# Altium PCB Sinistro_TestBed_RevA-1.PcbDoc (part 3 of 4)
Units mil, origin at the board's own origin, x right, y up, seen from the top; angles counter-clockwise.
Board outline 17000 x 8000 mil, 7 copper layers (Top Layer (*.GTL), MidLayer1 (*.G1), MidLayer2 (*.G2), MidLayer3 (*.G3), DIG GND (*.GP1), AGND (*.GP2), Bottom Layer (*.GBL)); 262 components, 309 nets, 2223 pads, 663 vias.
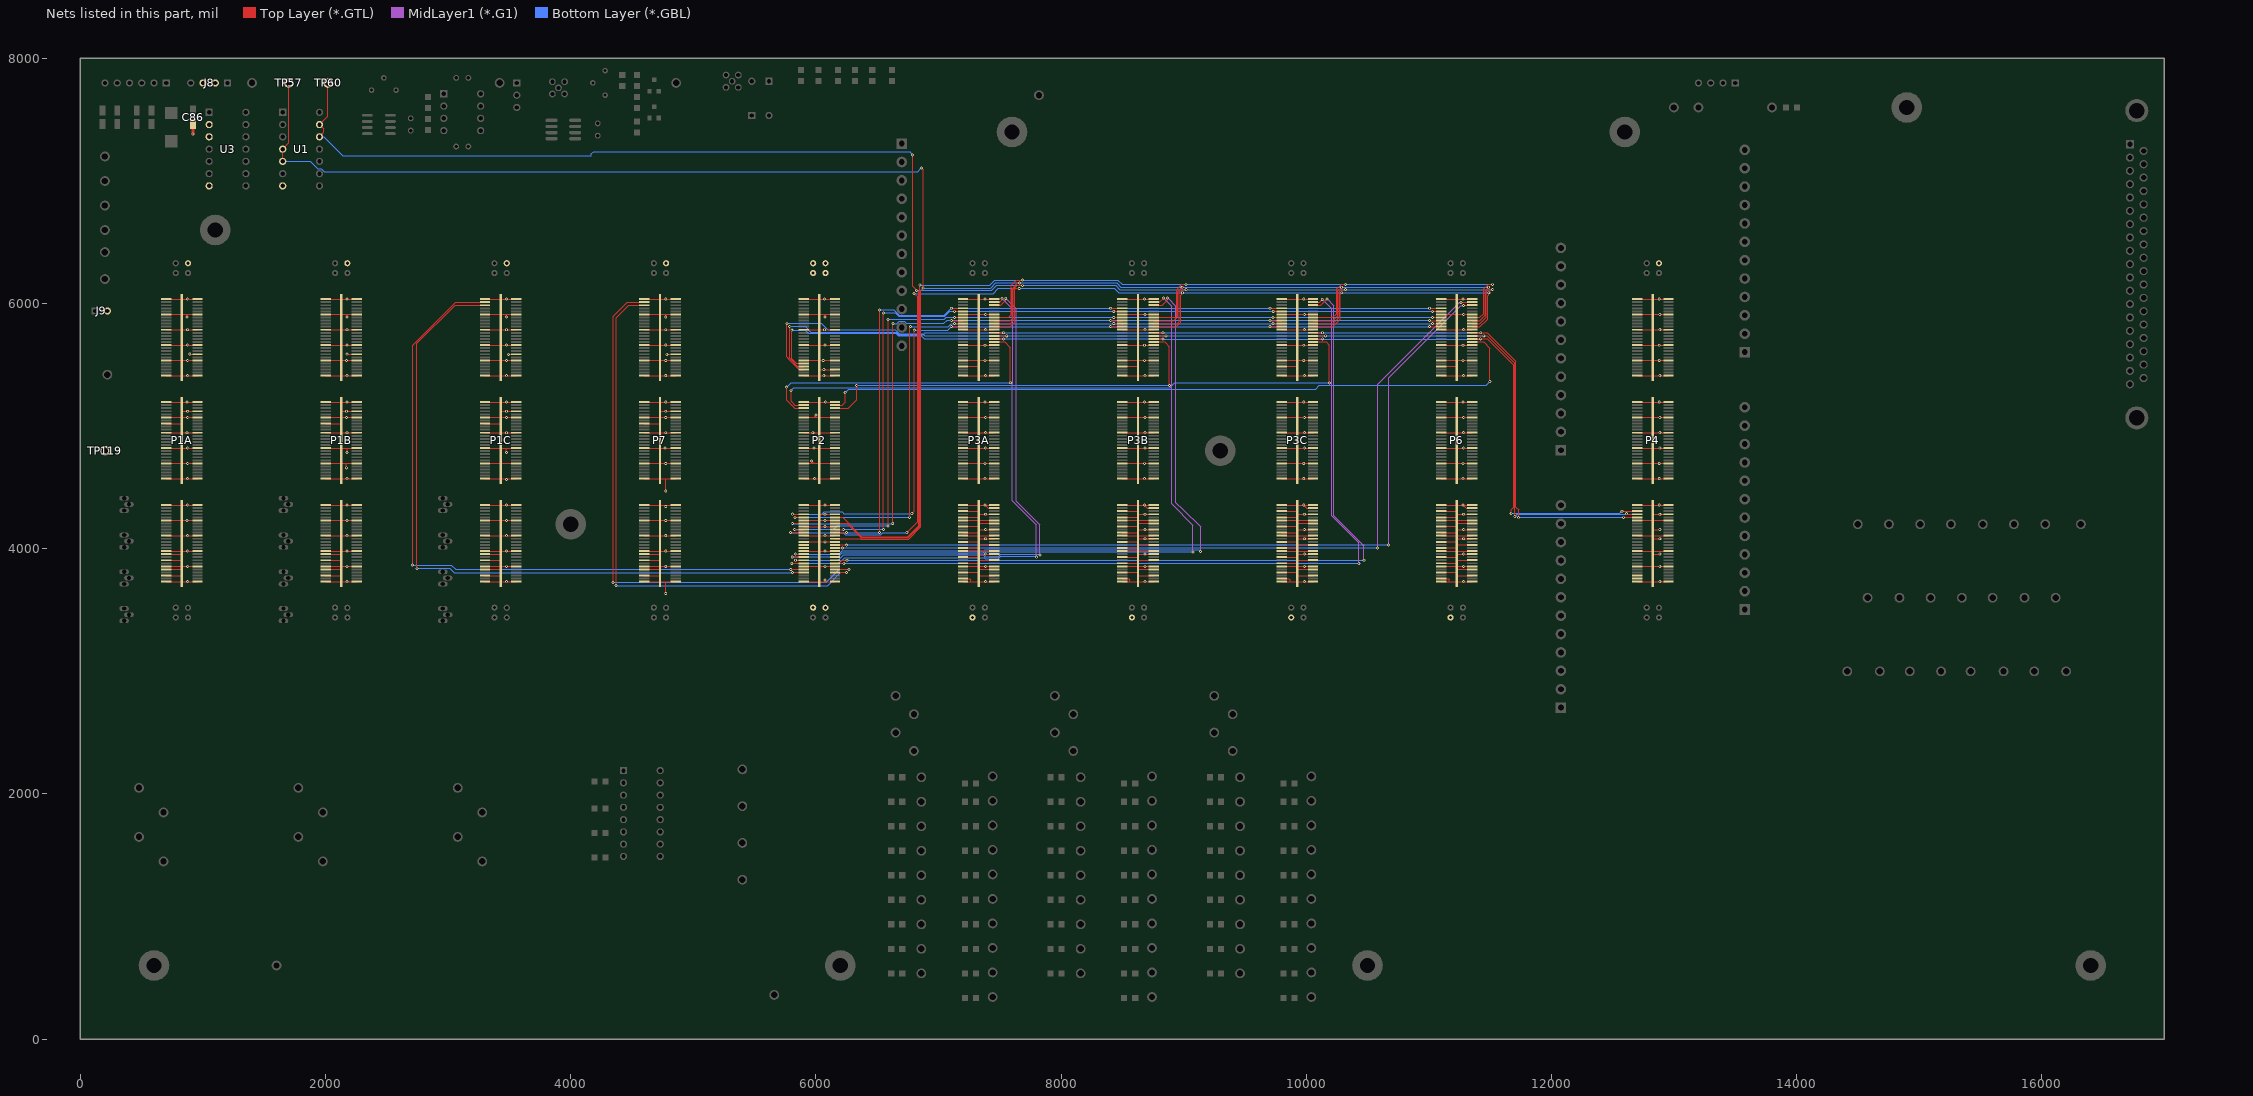
[diagram p8: the nets of this part, all layers, seen from the top]

## Via types
v1: diameter 24, hole 10, Top Layer (*.GTL) to Bottom Layer (*.GBL), 662 vias
v2: diameter 10, hole 10, Top Layer (*.GTL) to Bottom Layer (*.GBL), 1 vias

## Nets (pads, with @x,y where several pads share a name; then routed paths per layer and width w, separated by ;. In a path a pad name is that pad's centre, name@x,y a point inside that pad or via, vN(x,y) a via of type N, cw(c..) or ccw(c..) an arc to the next point about the centre after c; other vN are vias at no path point) (continued)
CLK_1_SEL_N: P2.99 P3A.29 | length 2549.6
  Top Layer (*.GTL) w5: v1@5762,5319 v1(5762,5318) 5762,5317 5761,5316 5762,5315 5762,5212 5762.84,5212 5828.42,5146.42 P2.99@5900.4,5146.42 ; P3A.29@7455.52,5686.77 7540.23,5686.77 7586,5641 v1(7586,5354)
  Bottom Layer (*.GBL) w5: v1(5762,5318) 5799,5355 7478,5355 7479,5354 v1(7586,5354)
CLK_2_N: P1C.153 P2.9 | length 5750.6
  Top Layer (*.GTL) w5: v1(2710,3866.26) 2710,5660 3061.57,6011.58 P1C.153@3300.4,6011.58 ; v1@5800,3825 v1(5795,3830) 5796.26,3831.26 P2.9@5900.4,3831.26
  Bottom Layer (*.GBL) w5: v1@2705,3861.26 v1(2710,3866.26) 3025.88,3866.26 3060.88,3831.26 v1@5796.26,3831.26
CLK_2_P: P1C.151 P2.7 | length 5689.9
  Top Layer (*.GTL) w5: v1(2745,3840) 2745,5675 3056.57,5986.58 P1C.151@3300.4,5986.58 ; v1(5810,3805) 5811.26,3806.26 P2.7@5900.4,3806.26
  Bottom Layer (*.GBL) w5: v1(2745,3840) 3015,3840 3050,3805 v1(5810,3805)
CLK_2_SEL_N: P2.100 P3B.29 | length 3338.1
  Top Layer (*.GTL) w5: P2.100@6155.52,5146.42 6262.42,5146.42 6333,5217 v1(6333,5331) ; P3B.29@8755.52,5686.77 8846.23,5686.77 8884,5649 v1(8884,5332) v1@8883,5332
  Bottom Layer (*.GBL) w5: v1@6333,5328 v1@6333,5329 ; v1(6333,5331) v1@6333,5329 ; v1(8884,5332) 6336,5332 v1@6333,5329
CLK_3_N: P2.10 P7.153 | length 4556.4
  Top Layer (*.GTL) w5: v1(4345,3725) 4345,5895 4461.57,6011.58 P7.153@4600.4,6011.58 ; P2.10@6155.52,3831.26 6268.74,3831.26 v1(6270,3830)
  Bottom Layer (*.GBL) w5: v1(4345,3725) 6084.64,3725 6190.9,3831.26 v1@6268.74,3831.26
CLK_3_P: P2.8 P7.151 | length 4475
  Top Layer (*.GTL) w5: v1(4370,3700) 4370,5884.64 4471.93,5986.58 P7.151@4600.4,5986.58 ; P2.8@6155.52,3806.26 6248.74,3806.26 v1(6250,3805)
  Bottom Layer (*.GBL) w5: v1(4370,3700) 6095,3700 6201.26,3806.26 v1@6248.74,3806.26
CLK_3_SEL_N: P2.101 P3C.29 | length 5079.3
  Top Layer (*.GTL) w5: P2.101@5900.4,5171.42 5829.58,5171.42 5797,5204 v1@5797,5291 ; P3C.29@10055.52,5686.77 10164.23,5686.77 10189,5662 v1(10189,5353) ; v1@5797,5291 v1(5797,5292) v1@5797,5291
  Bottom Layer (*.GBL) w5: v1@5797,5291 5818,5312 8837,5312 8838.5,5313.5 8891.66,5313.5 8904,5325.84 8904,5331 8926,5353 v1(10189,5353)
CLK_4_N: P2.15 P3A.5 | length 4434.4
  Top Layer (*.GTL) w5: v1(5834,3906) 5834.26,3906.26 P2.15@5900.4,3906.26 ; P3A.5@7455.52,5986.77 7508.77,5986.77 7549,6027 v1(7549,6043)
  MidLayer1 (*.G1) w5: v1(7549,6043) 7636,5956 7636,4388 7828,4196 v1(7828,3949)
  Bottom Layer (*.GBL) w5: v1(5834,3906) 6182,3906 6227,3951 7364.15,3951 7379.15,3936 7488.5,3936 7508.5,3956 7819.46,3956 7828,3947.46 v1(7828,3949)
CLK_4_P: P2.13 P3A.3 | length 4439.6
  Top Layer (*.GTL) w5: v1(5803,3881) 5803.26,3881.26 P2.13@5900.4,3881.26 ; P3A.3@7455.52,6011.77 7501.77,6011.77 7522,6032 7522,6037 v1(7519,6040) v1@7520,6040
  MidLayer1 (*.G1) w5: v1(7519,6040) 7604.5,5954.5 7604.5,5346.34 7602,5343.84 7602,4393 7799,4196 v1(7799,3931)
  Bottom Layer (*.GBL) w5: v1(5803,3881) 6188,3881 6234,3927 7375.31,3927 7382.31,3920 7486.49,3920 7506.49,3940 7674.83,3940 7790,3940 v1(7799,3931)
CLK_4_SEL_N: P2.102 P6.29 | length 5904.9
  Top Layer (*.GTL) w5: P2.102@6155.52,5171.42 6213.42,5171.42 6239,5197 v1(6239,5273) ; P6.29@11355.52,5686.77 11447.23,5686.77 11498,5636 v1(11498,5364)
  Bottom Layer (*.GBL) w5: v1@6239,5271 v1(6239,5273) 6239,5274 6268,5303 10076,5303 10107.5,5334.5 11468.5,5334.5 v1(11498,5364)
CLK_5_N: P2.19 P3B.5 | length 5719.8
  Top Layer (*.GTL) w5: v1@5835.74,3956.26 P2.19@5900.4,3956.26 ; P3B.5@8755.52,5986.77 8826.77,5986.77 8867,6027 8867,6044 v1(8869,6046) v1@8870,6046
  MidLayer1 (*.G1) w5: v1(8869,6046) 8937,5978 8937,4377 8991,4323 8994,4323 9139,4178 9139,3979 v1(9138,3978)
  Bottom Layer (*.GBL) w5: v1(5835,3957) 6188,3957 6214,3983 7371.03,3983 7381.03,3993 9123,3993 v1(9138,3978)
CLK_5_P: P2.17 P3B.3 | length 5643.7
  Top Layer (*.GTL) w5: v1@5808.74,3931.26 P2.17@5900.4,3931.26 ; P3B.3@8755.52,6011.77 8802.77,6011.77 v1(8836,6045)
  MidLayer1 (*.G1) w5: v1(8836,6045) 8902.5,5978.5 8902.5,4365.5 9075,4193 9075,3974.96 v1(9076,3974) ; v1(9076,3974) v1@9076,3974.96
  Bottom Layer (*.GBL) w5: v1(5807,3933) 6183,3933 6216,3966 7366.54,3966 7375.5,3974.96 v1@9076,3974.96
CLK_6_N: P2.16 P3C.5 | length 6708
  Top Layer (*.GTL) w5: P2.16@6155.52,3906.26 6253.74,3906.26 v1(6254,3906) ; P3C.5@10055.52,5986.77 10118.77,5986.77 v1(10170,6038)
  MidLayer1 (*.G1) w5: v1(10170,6038) 10225,5983 10225,4270 10471,4024 v1(10471,3906)
  Bottom Layer (*.GBL) w5: v1(6254,3906) v1(10471,3906)
CLK_6_P: P2.14 P3C.3 | length 6639.8
  Top Layer (*.GTL) w5: P2.14@6155.52,3881.26 6227.74,3881.26 v1(6228,3881) ; P3C.3@10055.52,6011.77 10108.77,6011.77 10132,6035 v1(10131,6035)
  MidLayer1 (*.G1) w5: v1(10131,6035) 10207.5,5958.5 10207.5,4731.5 ; 10208,4731 10207.5,4731.5 ; v1@10430,3881 v1(10429,3881) 10429,4048 10207.5,4269.5 10207.5,4731.5
  Bottom Layer (*.GBL) w5: v1(6228,3881) v1(10429,3881)
CLK_7_N: P2.26 P6.5 | length 6810.6
  Top Layer (*.GTL) w5: P2.26@6155.52,4031.26 6245.74,4031.26 v1(6248,4029) ; v1(11284,5985) 11285.77,5986.77 P6.5@11355.52,5986.77
  MidLayer1 (*.G1) w5: v1(10672,4030.5) 10672,5394 11261.5,5983.5 11282.5,5983.5 v1(11284,5985)
  Bottom Layer (*.GBL) w5: v1(6248,4029) 6249.5,4030.5 10629,4030.5 v1(10672,4030.5)
CLK_7_P: P2.24 P6.3 | length 6815.9
  Top Layer (*.GTL) w5: P2.24@6155.52,4006.26 6217.26,4006.26 6218,4007 v1(6218,4006) ; v1(11262,6008) 11265.77,6011.77 P6.3@11355.52,6011.77
  MidLayer1 (*.G1) w5: v1(10582,4006) 10582,5343 11243,6004 11243,6005 11246,6008 v1(11262,6008)
  Bottom Layer (*.GBL) w5: v1(6218,4006) v1(10582,4006)
  other v1: 10582,4006
CLK_8_N: P2.25
CLK_8_P: P2.23
CLK_8N: P4.5
CLK_8P: P4.3
CLK_9_N: P2.20
CLK_9_P: P2.18
CLK_BRD_I/O.I_ADDR0: P2.109 P3A.23 P3B.23 P3C.23 P4.43 P6.23 | length 9095.6
  Top Layer (*.GTL) w5: v1(5765,5839) 5763,5837 5763,5566 5776.5,5552.5 5776.5,5549.04 5863.97,5461.58 P2.109@5900.4,5461.58 ; P3A.23@7455.52,5761.77 7531.77,5761.77 v1(7532,5762) ; P3B.23@8756,5762 v1(8832,5762) ; P3C.23@10057,5763 v1@10133,5763 ; P6.23@11349,5763 v1@11425,5763 ; v1(11424,5762) 11478,5762 11711,5529 11711,4340 11732,4319 v1(11732,4253) ; v1(12587.74,4256.26) P4.43@12700.4,4256.26
  Bottom Layer (*.GBL) w5: v1(5765,5839) 6044.47,5839 6097.47,5786 6648.56,5786 6679.37,5755.19 6882.19,5755.19 6889,5762 v1(7532,5762) v1(8832,5762) v1(10132,5762) v1(11424,5762) ; v1(11732,4253) 11735.26,4256.26 v1(12587.74,4256.26)
CLK_BRD_I/O.I_ADDR1: P2.111 P3A.25 P3B.25 P3C.25 P4.45 P6.25 | length 9120.9
  Top Layer (*.GTL) w5: v1@5787,5814 v1(5786,5814) 5786,5809 5785.5,5808.5 5785.5,5552.77 5851.7,5486.58 P2.111@5900.4,5486.58 ; P3A.25@7455.52,5736.77 7556.77,5736.77 v1(7557,5737) ; P3B.25@8755.52,5736.77 8856.77,5736.77 v1(8857,5737) ; P3C.25@10056.52,5737.77 v1@10157.77,5737.77 ; P6.25@11348.52,5737.77 v1@11449.77,5737.77 ; v1(11449,5737) 11478,5737 11702,5513 v1(11702,4262) ; v1(12614,4286) 12618.74,4281.26 P4.45@12700.4,4281.26
  Bottom Layer (*.GBL) w5: v1(5786,5814) 5913,5814 5958.93,5768.08 6653.76,5768.08 6670.37,5751.47 6675.64,5746.19 6879.81,5746.19 6889,5737 v1(7557,5737) v1(8857,5737) v1(10157,5737) v1(11449,5737) ; v1(11702,4262) 11720,4280 v1@12608,4280 ; v1@12608,4280 v1(12614,4286) v1@12608,4280
CLK_BRD_I/O.I_ADDR2: P2.113 P3A.27 P3B.27 P3C.27 P4.47 P6.27 | length 8900.7
  Top Layer (*.GTL) w5: v1@5803,5782 5803,5548 5839.43,5511.58 P2.113@5900.4,5511.58 ; P3A.27@7455.52,5711.77 v1@7530.23,5711.77 ; P3B.27@8755.52,5711.77 8830.23,5711.77 v1(8831,5711) ; P3C.27@10056.52,5712.77 v1(10131.23,5712.77) ; P6.27@11355.52,5712.77 v1(11423.23,5712.77) 11478,5712.77 11693,5497.77 11693,4340 11672,4319 v1(11672,4289) ; v1(12576,4306) 12576.26,4306.26 P4.47@12700.4,4306.26
  Bottom Layer (*.GBL) w5: v1(5804,5783) 5913,5783 5936.92,5759.08 6650.03,5759.08 6661.37,5747.74 6671.91,5737.19 6859,5737.19 6884.42,5711.77 v1@8831,5711.77 ; v1(8831,5711) 11421.46,5711 v1(11423.23,5712.77) ; v1(11672,4289) 12559,4289 v1(12576,4306)
  other v1: 7531,5711
CLK_BRD_I/O.MPP: P2.45 P3A.20 P3B.20 P3C.20 P6.20 | length 7179.2
  Top Layer (*.GTL) w5: v1(5810,4282) 5810.74,4281.26 P2.45@5900.4,4281.26 ; v1(6782.5,4286.5) 6803,4307 v1(6803,5783) ; v1(7105,5812) 7105.23,5811.77 P3A.20@7200.4,5811.77 ; v1(8405,5812) 8405.23,5811.77 P3B.20@8500.4,5811.77 ; v1(9705,5812) 9705.23,5811.77 P3C.20@9800.4,5811.77 ; v1(11005,5812) 11005.23,5811.77 P6.20@11100.4,5811.77
  Bottom Layer (*.GBL) w5: v1(5810,4282) 6049.58,4282 6067.34,4299.76 6214.08,4299.76 6227.34,4286.5 v1(6782.5,4286.5) v1@6784,4285 ; v1(6803,5783) 7076,5783 v1(7105,5812) v1(11005,5812)
CLK_BRD_I/O.P1: P2.33 P3A.19 P3B.19 P3C.19 P6.19 | length 9619.7
  Top Layer (*.GTL) w5: v1(5792,4132) 5792.74,4131.26 P2.33@5900.4,4131.26 ; v1(6742,4132) 6829.31,4219.31 6829.31,6054 6801.31,6082 v1(6800,6082) ; P3A.19@7455.52,5811.77 7584.77,5811.77 7621,5848 7621,6115 7629,6123 v1(7659,6123) ; P3B.19@8755.52,5811.77 8939.77,5811.77 8975,5847 8975,6066 8990,6081 v1(8990,6088.5) ; P3C.19@10055.52,5811.77 10217.84,5811.77 10278,5871.93 10278,6076.5 v1(10290,6088.5) v1@10290,6081 ; P6.19@11355.52,5811.77 11417.84,5811.77 11480,5873.93 11480,6063 11491,6074 11491,6088.5 v1(11490,6088.5) v1@11490,6081
  Bottom Layer (*.GBL) w5: v1(5792,4132) 6222.84,4132 6241.34,4113.5 6527.66,4113.5 6546.16,4132 v1(6742,4132) ; v1(6800,6082) 7446.05,6082 7487.55,6123.5 8434.57,6123.5 8469.57,6088.5 v1(11490,6088.5)
CLK_BRD_I/O.P2: P2.35 P3A.14 P3B.14 P3C.14 P6.14 | length 7264.6
  Top Layer (*.GTL) w5: v1(5827,4157) 5827.74,4156.26 P2.35@5900.4,4156.26 ; v1(6589,5871) 6589,4189 v1@6588,4188 ; v1(7130,5887) 7130.23,5886.77 P3A.14@7200.4,5886.77 ; v1(8430,5887) 8430.23,5886.77 P3B.14@8500.4,5886.77 ; v1(9730,5887) 9730.23,5886.77 P3C.14@9800.4,5886.77 ; v1(11030,5887) 11030.23,5886.77 P6.14@11100.4,5886.77 ; v1@6588,4188 v1(6588,4186) v1@6588,4188
  Bottom Layer (*.GBL) w5: v1(5827,4157) 6145,4157 6176,4188 v1@6588,4188 ; v1(6589,5871) 7048,5871 7064,5887 v1(7130,5887) v1(8430,5887) v1(9730,5887) v1(11030,5887)
CLK_BRD_I/O.P3: P2.39 P3A.16 P3B.16 P3C.16 P6.16 | length 7331.1
  Top Layer (*.GTL) w5: v1(5808,4205) 5809.26,4206.26 P2.39@5900.4,4206.26 ; v1(6627,4207) 6627,4206 6628,4205 6629,4206 v1(6629,5837) ; v1(7105,5863) 7106.23,5861.77 P3A.16@7200.4,5861.77 ; v1(8405,5863) 8406.23,5861.77 P3B.16@8500.4,5861.77 ; v1(9705,5863) 9706.23,5861.77 P3C.16@9800.4,5861.77 ; v1(11005,5863) 11006.23,5861.77 P6.16@11100.4,5861.77
  Bottom Layer (*.GBL) w5: v1(5808,4205) v1@6627,4205 ; v1(6629,5837) 6661.56,5837 6679.37,5854.81 6720.63,5854.81 6737.44,5838 7045,5838 7070,5863 v1(7105,5863) v1(8405,5863) v1(9705,5863) v1(11005,5863)
CLK_BRD_I/O.RG: P2.44 P3A.17 P3B.17 P3C.17 P6.17 TP60.1 U1.12 U1.13 | length 15896.8
  Top Layer (*.GTL) w5: P2.44@6155.52,4256.26 6217.84,4256.26 6375.1,4099 6749.72,4099 6838.51,4187.79 6838.51,6091.49 v1(6822,6108) 6789,6141 v1(6789,7212) ; P3A.17@7455.52,5836.77 7585.77,5836.77 7612,5863 7612,6118.73 7642.77,6149.5 7684.5,6149.5 v1(7685,6149) v1@7684,6149 ; P3B.17@8755.52,5836.77 8946.77,5836.77 8955,5845 8960.27,5845 8966,5850.73 8966,6090.66 8989.84,6114.5 v1(9021,6114.5) ; P3C.17@10055.52,5836.77 10217.84,5836.77 10268,5886.93 10268,6094.5 10288,6114.5 ; 10289.84,6114.5 v1(10321,6114.5) ; P6.17@11355.52,5836.77 11417.84,5836.77 11470,5888.93 11470,6094.66 11482.34,6107 11482.5,6107 11490,6114.5 ; 11489.84,6114.5 11490,6114.5 ; v1(11521,6114.5) 11490,6114.5
  Top Layer (*.GTL) w10: U1.12@1950,7360 1986,7396 1986,7425 1985,7425 U1.13@1950,7460 2017,7527 TP60.1@2017,7763
  Bottom Layer (*.GBL) w5: v1@6787.5,7213.5 v1(6789,7212) ; v1(6822,6108) 7435.28,6108 7476.78,6149.5 8445.34,6149.5 8480.34,6114.5 v1(9021,6114.5) v1(10321,6114.5) v1(11521,6114.5)
  Bottom Layer (*.GBL) w10: U1.12@1950,7360 1986,7360 2140,7206 4168.84,7206 4168.84,7221.84 4186,7239 6772,7239 6772,7229 v1@6787.5,7213.5
CLK_BRD_I/O.S1: P2.34 P3A.8 P3B.8 P3C.8 P6.8 | length 7089.7
  Top Layer (*.GTL) w5: P2.34@6155.52,4131.26 6248.26,4131.26 v1(6249,4132) ; v1(6519,5948) 6519,4133 v1(6520,4132) ; v1(7105,5962) 7105.23,5961.77 P3A.8@7200.4,5961.77 ; v1(8405,5962) 8405.23,5961.77 P3B.8@8500.4,5961.77 ; v1(9705,5962) 9705.23,5961.77 P3C.8@9800.4,5961.77 ; v1(11005,5962) 11005.23,5961.77 P6.8@11100.4,5961.77
  Bottom Layer (*.GBL) w5: v1(6249,4132) v1@6519,4132 ; v1(6519,5948) 6636.56,5948 6679.37,5905.19 7048.19,5905.19 v1(7105,5962) v1(8405,5962) v1(9705,5962) v1(11005,5962) v1@11005.23,5962
CLK_BRD_I/O.S2: P2.36 P3A.10 P3B.10 P3C.10 P6.10 | length 6951.9
  Top Layer (*.GTL) w5: P2.36@6155.52,4156.26 6222.26,4156.26 v1(6224,4158) v1@6225,4158 ; v1(6551,4158) v1(6551,5924) ; v1(7130,5937) 7130.23,5936.77 P3A.10@7200.4,5936.77 ; v1(8430,5937) 8430.23,5936.77 P3B.10@8500.4,5936.77 ; v1(9731,5937) 9800.17,5937 P3C.10@9800.4,5936.77 ; v1(11029.23,5937) 11100.17,5937 P6.10@11100.4,5936.77
  Bottom Layer (*.GBL) w5: v1(6224,4158) v1(6551,4158) ; v1(6551,5924) 6647.84,5924 6670.37,5901.47 6675.64,5896.19 7051.92,5896.19 7092.73,5937 v1(7130,5937) 8355.77,5937 ; 8356,5936.77 8355.77,5937 ; v1(11029.23,5937) v1(9731,5937) v1(8430,5937) 8355.77,5937
CLK_BRD_I/O.S3: P2.40 P3A.13 P3B.13 P3C.13 P6.13 | length 9341.2
  Top Layer (*.GTL) w5: P2.40@6155.52,4206.26 6253.7,4206.26 6370.96,4089 6753.86,4089 6847.7,4182.84 v1(6847.7,6150.5) ; P3A.13@7455.52,5886.77 7572.77,5886.77 7594,5908 7594,6151 7634,6191 7684,6191 v1(7685,6192) v1@7684,6192 ; P3B.13@8755.52,5886.77 8931.04,5886.77 8942,5897.73 8942,6113.16 8985.84,6157 v1(9019,6157) ; P3C.13@10055.52,5886.77 10217.84,5886.77 10248,5916.93 10248,6119.16 10280.34,6151.5 10280.5,6151.5 10286,6157 ; 10285.84,6157 10286,6157 ; v1(10319,6157) 10287,6157 ; P6.13@11355.52,5886.77 11417.84,5886.77 11450,5918.93 11450,6121.16 11480.34,6151.5 11480.5,6151.5 11486,6157 ; 11485.84,6157 11486,6157 ; v1(11519,6157) 11487,6157 ; 10286,6157 10287,6157 ; 10286,6157 10287,6157 ; 11486,6157 11487,6157 ; 11486,6157 11487,6157
  Bottom Layer (*.GBL) w5: v1(6847.7,6150.5) 7417.68,6150.5 7459.18,6192 8462.94,6192 8497.94,6157 v1(11519,6157)
CLK_BRD_I/O.SG: P2.30 P3A.15 P3B.15 P3C.15 P6.15 TP57.1 U1.4 U1.5 | length 16018.9
  Top Layer (*.GTL) w5: P2.30@6155.52,4081.26 6364.56,4081.26 6366.82,4079 6758,4079 6856.7,4177.7 6856.7,6108 6875,6126.3 v1(6875,6126.5) 6875,7093 v1(6861,7107) ; P3A.15@7455.52,5861.77 7586.77,5861.77 7603,5878 7603,6122.46 7648.54,6168 v1(7660,6168) 7660,6165 7659,6164 v1@7658,6164 ; P3B.15@8755.52,5861.77 8918.77,5861.77 8951,5894 8951,6096 v1(8988,6133) ; P3C.15@10055.52,5861.77 10217.84,5861.77 10258,5901.93 10258,6103 v1(10288,6133) ; P6.15@11355.52,5861.77 11417.84,5861.77 11460,5903.93 11460,6105 v1(11488,6133)
  Top Layer (*.GTL) w10: U1.5@1650,7160 U1.4@1650,7260 1700,7310 TP57.1@1700,7800
  Bottom Layer (*.GBL) w5: v1(6875,6126.5) 7427.62,6126.5 7469.12,6168 v1(7660,6168) 8453,6168 8488,6133 v1(8988,6133) v1(10288,6133) v1(11488,6133)
  Bottom Layer (*.GBL) w10: U1.5@1650,7160 1875,7160 1936.47,7098.53 1965.96,7098.53 1989.49,7075 6829,7075 v1(6861,7107)
CLK_BRD_I/O.TG: P2.43 P3A.18 P3B.18 P3C.18 P6.18 | length 7126.4
  Top Layer (*.GTL) w5: v1(5829,4256) 5829.26,4256.26 P2.43@5900.4,4256.26 ; v1(6764,4256) 6764,5804 v1(6772,5812) ; v1(7130,5837) 7130.23,5836.77 P3A.18@7200.4,5836.77 ; v1(8430,5837) 8430.23,5836.77 P3B.18@8500.4,5836.77 ; v1(9730,5837) 9730.23,5836.77 P3C.18@9800.4,5836.77 ; v1(11030,5837) 11030.23,5836.77 P6.18@11100.4,5836.77
  Bottom Layer (*.GBL) w5: v1(5829,4256) 6773,4256 v1@6773,4255 ; v1(6772,5812) 7078.84,5812 7103.84,5837 v1(7130,5837) v1(8430,5837) v1(9730,5837) v1(11030,5837) v1@11030.23,5837
GND: C86.2 J8.2 J8.3 J9.2 P1A.1 P1A.2 P1A.5 P1A.9 P1A.11 P1A.12 P1A.15 P1A.19 P1A.21 P1A.22 P1A.31 P1A.32 P1A.41 P1A.42 P1A.51 P1A.52 P1A.53 P1A.54 P1A.63 P1A.64 P1A.73 P1A.74 P1A.83 P1A.84 P1A.89 P1A.93 P1A.94 P1A.98 P1A.103 P1A.104 P1A.105 P1A.106 P1A.115 P1A.116 P1A.120 P1A.125 P1A.126 P1A.135 P1A.136 P1A.145 P1A.146 P1A.155 P1A.156 P1A.157 P1A.158 P1A.159 P1A.PC08 P1B.1 P1B.2 P1B.5 P1B.9 P1B.11 P1B.12 P1B.15 P1B.19 P1B.21 P1B.22 P1B.31 P1B.32 P1B.41 P1B.42 P1B.51 P1B.52 P1B.53 P1B.54 P1B.63 P1B.64 P1B.73 P1B.74 P1B.83 P1B.84 P1B.89 P1B.93 P1B.94 P1B.98 P1B.103 P1B.104 P1B.105 P1B.106 P1B.115 P1B.116 P1B.120 P1B.125 P1B.126 P1B.135 P1B.136 P1B.145 P1B.146 P1B.155 P1B.156 P1B.157 P1B.158 P1B.159 P1B.PC08 P1C.1 P1C.2 P1C.5 P1C.9 P1C.11 P1C.12 P1C.15 P1C.19 P1C.21 P1C.22 P1C.31 P1C.32 P1C.41 P1C.42 P1C.51 P1C.52 P1C.53 P1C.54 P1C.63 P1C.64 P1C.73 P1C.74 P1C.83 P1C.84 P1C.89 P1C.93 P1C.94 P1C.98 P1C.103 P1C.104 P1C.105 P1C.106 P1C.115 P1C.116 P1C.120 P1C.125 P1C.126 P1C.135 P1C.136 P1C.145 P1C.146 P1C.155 P1C.156 P1C.157 P1C.158 P1C.159 P1C.PC08 P2.1 P2.2 P2.11 P2.12 P2.21 P2.22 P2.27 P2.28 P2.31 P2.32 P2.37 P2.38 P2.41 P2.42 P2.46 P2.51 P2.52 P2.53 P2.54 P2.63 P2.64 P2.73 P2.74 P2.83 P2.84 P2.93 P2.94 P2.103 P2.104 P2.105 P2.106 P2.110 P2.115 P2.116 P2.125 P2.126 P2.135 P2.136 P2.145 P2.146 P2.155 P2.156 P2.157 P2.158 P2.159 P2.PC03 P2.PC04 P2.PC05 P2.PC06 P2.PC07 P2.PC08 P3A.1 P3A.2 P3A.11 P3A.12 P3A.21 P3A.22 P3A.31 P3A.32 P3A.41 P3A.42 P3A.46 P3A.51 P3A.52 P3A.53 P3A.54 P3A.63 P3A.64 P3A.73 P3A.74 P3A.83 P3A.84 P3A.93 P3A.94 P3A.103 P3A.104 P3A.105 P3A.106 P3A.107 P3A.110 P3A.111 P3A.114 P3A.115 P3A.116 P3A.117 P3A.120 P3A.121 P3A.124 P3A.125 P3A.126 P3A.127 P3A.130 P3A.131 P3A.134 P3A.135 P3A.136 P3A.137 P3A.140 P3A.141 P3A.144 P3A.145 P3A.146 P3A.147 P3A.150 P3A.151 P3A.154 P3A.155 P3A.156 P3A.157 P3A.158 P3A.159 P3A.PC08 P3B.1 P3B.2 P3B.11 P3B.12 P3B.21 P3B.22 P3B.31 P3B.32 P3B.41 P3B.42 P3B.46 P3B.51 P3B.52 P3B.53 P3B.54 P3B.63 P3B.64 P3B.73 P3B.74 P3B.83 P3B.84 P3B.93 P3B.94 P3B.103 P3B.104 P3B.105 P3B.106 P3B.107 P3B.110 P3B.111 P3B.114 P3B.115 P3B.116 P3B.117 P3B.120 P3B.121 P3B.124 P3B.125 P3B.126 P3B.127 P3B.130 P3B.131 P3B.134 P3B.135 P3B.136 P3B.137 P3B.140 P3B.141 P3B.144 P3B.145 P3B.146 P3B.147 P3B.150 P3B.151 P3B.154 P3B.155 P3B.156 P3B.157 P3B.158 P3B.159 P3B.PC08 P3C.1 P3C.2 P3C.11 P3C.12 P3C.21 P3C.22 P3C.31 P3C.32 P3C.41 P3C.42 P3C.46 P3C.51 P3C.52 P3C.53 P3C.54 P3C.63 P3C.64 P3C.73 P3C.74 P3C.83 P3C.84 P3C.93 P3C.94 P3C.103 P3C.104 P3C.105 P3C.106 P3C.107 P3C.110 P3C.111 P3C.114 P3C.115 P3C.116 P3C.117 P3C.120 P3C.121 P3C.124 P3C.125 P3C.126 P3C.127 P3C.130 P3C.131 P3C.134 P3C.135 P3C.136 P3C.137 P3C.140 P3C.141 P3C.144 P3C.145 P3C.146 P3C.147 P3C.150 P3C.151 P3C.154 P3C.155 P3C.156 P3C.157 P3C.158 P3C.159 P3C.PC08 P4.1 P4.2 P4.11 P4.12 P4.21 P4.22 P4.31 P4.32 P4.41 P4.42 P4.46 P4.51 P4.52 P4.53 P4.54 P4.63 P4.64 P4.73 P4.74 P4.83 P4.84 P4.93 P4.94 P4.103 P4.104 P4.105 P4.106 P4.115 P4.116 P4.125 P4.126 P4.135 P4.136 P4.145 P4.146 P4.155 P4.156 P4.157 P4.158 P4.159 P4.PC08 P6.1 P6.2 P6.11 P6.12 P6.21 P6.22 P6.31 P6.32 P6.41 P6.42 P6.46 P6.51 P6.52 P6.53 P6.54 P6.63 P6.64 P6.73 P6.74 P6.83 P6.84 P6.93 P6.94 P6.103 P6.104 P6.105 P6.106 P6.107 P6.110 P6.111 P6.114 P6.115 P6.116 P6.117 P6.120 P6.121 P6.124 P6.125 P6.126 P6.127 P6.130 P6.131 P6.134 P6.135 P6.136 P6.137 P6.140 P6.141 P6.144 P6.145 P6.146 P6.147 P6.150 P6.151 P6.154 P6.155 P6.156 P6.157 P6.158 P6.159 P6.PC08 P7.1 P7.2 P7.5 P7.9 P7.11 P7.12 P7.15 P7.19 P7.21 P7.22 P7.31 P7.32 P7.41 P7.42 P7.51 P7.52 P7.53 P7.54 P7.63 P7.64 P7.73 P7.74 P7.83 P7.84 P7.89 P7.93 P7.94 P7.98 P7.103 P7.104 P7.105 P7.106 P7.115 P7.116 P7.120 P7.125 P7.126 P7.135 P7.136 P7.145 P7.146 P7.155 P7.156 P7.157 P7.158 P7.159 P7.PC08 TP119.1 U1.7 U3.2 U3.3 U3.7 | length 63976.3
  Top Layer (*.GTL) w5: P1A.5@695,3780 P1A.157@824.26,3780 ; P1A.9@695,3831.26 P1A.157@824.26,3831.26 ; P1A.89@700,5020 P1A.158@829.26,5020 ; P1A.1@700.4,3731.26 P1A.157@829.66,3731.26 ; P1A.11@700.4,3856.26 P1A.157@829.66,3856.26 ; P1A.15@700.4,3906.26 P1A.157@829.66,3906.26 ; P1A.19@700.4,3956.26 P1A.157@829.66,3956.26 ; P1A.21@700.4,3981.26 P1A.157@829.66,3981.26 ; P1A.31@700.4,4106.26 P1A.157@829.66,4106.26 ; P1A.41@700.4,4231.26 P1A.157@829.66,4231.26 ; P1A.51@700.4,4356.26 P1A.157@829.66,4356.26 ; P1A.53@700.4,4571.42 P1A.158@829.66,4571.42 ; P1A.63@700.4,4696.42 P1A.158@829.66,4696.42 ; P1A.73@700.4,4821.42 P1A.158@829.66,4821.42 ; P1A.83@700.4,4946.42 P1A.158@829.66,4946.42 ; P1A.93@700.4,5071.42 P1A.158@829.66,5071.42 ; P1A.103@700.4,5196.42 P1A.158@829.66,5196.42 ; P1A.105@700.4,5411.58 P1A.159@829.66,5411.58 ; P1A.115@700.4,5536.58 P1A.159@829.66,5536.58 ; P1A.125@700.4,5661.58 P1A.159@829.66,5661.58 ; P1A.135@700.4,5786.58 P1A.159@829.66,5786.58 ; P1A.145@700.4,5911.58 P1A.159@829.66,5911.58 ; P1A.155@700.4,6036.58 P1A.159@829.66,6036.58 ; P1A.157@826.26,3731.26 v1(875,3731.26) P1A.2@955.52,3731.26 ; P1A.157@826.26,3856.26 v1(875,3856.26) P1A.12@955.52,3856.26 ; P1A.157@826.26,3981.26 v1(875,3981.26) P1A.22@955.52,3981.26 ; P1A.157@826.26,4106.26 v1(875,4106.26) P1A.32@955.52,4106.26 ; P1A.157@826.26,4231.26 v1(870,4231.26) P1A.42@955.52,4231.26 ; P1A.157@826.26,4356.26 v1(875,4356.26) P1A.52@955.52,4356.26 ; P1A.158@826.26,4571.42 v1(875,4571.42) P1A.54@955.52,4571.42 ; P1A.158@826.26,4696.42 v1(875,4696.42) P1A.64@955.52,4696.42 ; P1A.158@826.26,4821.42 v1(875,4821.42) P1A.74@955.52,4821.42 ; P1A.158@826.26,4946.42 v1(870,4946.42) P1A.84@955.52,4946.42 ; P1A.158@826.26,5071.42 v1(875,5071.42) P1A.94@955.52,5071.42 ; P1A.158@826.26,5121.42 v1(875,5121.42) P1A.98@955.52,5121.42 ; P1A.158@826.26,5196.42 v1(870,5196.42) P1A.104@955.52,5196.42 ; P1A.159@826.26,5411.58 v1(875,5411.58) P1A.106@955.52,5411.58 ; P1A.159@826.26,5536.58 v1(875,5536.58) P1A.116@955.52,5536.58 ; P1A.159@826.26,5661.58 v1(875,5661.58) P1A.126@955.52,5661.58 ; P1A.159@826.26,5786.58 v1(875,5786.58) P1A.136@955.52,5786.58 ; P1A.159@826.26,6036.58 v1(875,6036.58) P1A.156@955.52,6036.58 ; P1A.159@830.74,5911.5 870,5911.5 ; v1(892,5588) 954.09,5588 P1A.120@955.52,5586.58 ; P1A.146@955.52,5911.5 870,5911.5 ; P1B.5@1995,3780 P1B.157@2124.26,3780 ; P1B.9@1995,3831.26 P1B.157@2124.26,3831.26 ; P1B.89@2000,5020 P1B.158@2129.26,5020 ; P1B.1@2000.4,3731.26 P1B.157@2129.66,3731.26 ; P1B.11@2000.4,3856.26 P1B.157@2129.66,3856.26 ; P1B.15@2000.4,3906.26 P1B.157@2129.66,3906.26 ; P1B.19@2000.4,3956.26 P1B.157@2129.66,3956.26 ; P1B.21@2000.4,3981.26 P1B.157@2129.66,3981.26 ; P1B.31@2000.4,4106.26 P1B.157@2129.66,4106.26 ; P1B.41@2000.4,4231.26 P1B.157@2129.66,4231.26 ; P1B.51@2000.4,4356.26 P1B.157@2129.66,4356.26 ; P1B.53@2000.4,4571.42 P1B.158@2129.66,4571.42 ; P1B.63@2000.4,4696.42 P1B.158@2129.66,4696.42 ; P1B.73@2000.4,4821.42 P1B.158@2129.66,4821.42 ; P1B.83@2000.4,4946.42 P1B.158@2129.66,4946.42 ; P1B.93@2000.4,5071.42 P1B.158@2129.66,5071.42 ; P1B.103@2000.4,5196.42 P1B.158@2129.66,5196.42 ; P1B.105@2000.4,5411.58 P1B.159@2129.66,5411.58 ; P1B.115@2000.4,5536.58 P1B.159@2129.66,5536.58 ; P1B.125@2000.4,5661.58 P1B.159@2129.66,5661.58 ; P1B.135@2000.4,5786.58 P1B.159@2129.66,5786.58 ; P1B.145@2000.4,5911.58 P1B.159@2129.66,5911.58 ; P1B.155@2000.4,6036.58 P1B.159@2129.66,6036.58 ; P1B.157@2126.26,3731.26 v1(2175,3731.26) P1B.2@2255.52,3731.26 ; P1B.157@2126.26,3856.26 v1(2175,3856.26) P1B.12@2255.52,3856.26 ; P1B.157@2126.26,3981.26 v1(2175,3981.26) P1B.22@2255.52,3981.26 ; P1B.157@2126.26,4106.26 v1(2175,4106.26) P1B.32@2255.52,4106.26 ; P1B.157@2126.26,4231.26 v1(2175,4231.26) P1B.42@2255.52,4231.26 ; P1B.157@2126.26,4356.26 v1(2175,4356.26) P1B.52@2255.52,4356.26 ; P1B.158@2126.26,4571.42 v1(2175,4571.42) P1B.54@2255.52,4571.42 ; P1B.158@2126.26,4946.42 v1(2175,4946.42) P1B.84@2255.52,4946.42 ; P1B.158@2126.26,5071.42 v1(2170,5071.42) P1B.94@2255.52,5071.42 ; P1B.158@2126.26,5121.42 v1(2170,5121.42) P1B.98@2255.52,5121.42 ; P1B.158@2126.26,5196.42 v1(2175,5196.42) P1B.104@2255.52,5196.42 ; P1B.159@2126.26,5411.58 v1(2175,5411.58) P1B.106@2255.52,5411.58 ; P1B.159@2126.26,5536.58 v1(2170,5536.58) P1B.116@2255.52,5536.58 ; P1B.159@2126.26,5661.58 v1(2175,5661.58) P1B.126@2255.52,5661.58 ; P1B.159@2126.26,5786.58 v1(2175,5786.58) P1B.136@2255.52,5786.58 ; P1B.159@2126.26,6036.58 v1(2175,6036.58) P1B.156@2255.52,6036.58 ; P1B.158@2127.96,4696.42 2170,4696.42 ; P1B.158@2127.96,4821.42 2175,4821.42 ; P1B.159@2130.74,5911.5 2175,5911.5 ; v1(2174,5587) 2174.42,5586.58 P1B.120@2255.52,5586.58 ; P1B.64@2255.52,4696.42 2170,4696.42 ; P1B.74@2255.52,4821.42 2175,4821.42 ; P1B.146@2255.52,5911.5 2175,5911.5 ; P1C.5@3295,3780 P1C.157@3424.26,3780 ; P1C.9@3295,3831.26 P1C.157@3424.26,3831.26 ; P1C.89@3300,5020 P1C.158@3429.26,5020 ; P1C.1@3300.4,3731.26 P1C.157@3429.66,3731.26 ; P1C.11@3300.4,3856.26 P1C.157@3429.66,3856.26 ; P1C.15@3300.4,3906.26 P1C.157@3429.66,3906.26 ; P1C.19@3300.4,3956.26 P1C.157@3429.66,3956.26 ; P1C.21@3300.4,3981.26 P1C.157@3429.66,3981.26 ; P1C.31@3300.4,4106.26 P1C.157@3429.66,4106.26 ; P1C.41@3300.4,4231.26 P1C.157@3429.66,4231.26 ; P1C.51@3300.4,4356.26 P1C.157@3429.66,4356.26 ; P1C.53@3300.4,4571.42 P1C.158@3429.66,4571.42 ; P1C.63@3300.4,4696.42 P1C.158@3429.66,4696.42 ; P1C.73@3300.4,4821.42 P1C.158@3429.66,4821.42 ; P1C.83@3300.4,4946.42 P1C.158@3429.66,4946.42 ; P1C.93@3300.4,5071.42 P1C.158@3429.66,5071.42 ; P1C.103@3300.4,5196.42 P1C.158@3429.66,5196.42 ; P1C.105@3300.4,5411.58 P1C.159@3429.66,5411.58 ; P1C.115@3300.4,5536.58 P1C.159@3429.66,5536.58 ; P1C.125@3300.4,5661.58 P1C.159@3429.66,5661.58 ; P1C.135@3300.4,5786.58 P1C.159@3429.66,5786.58 ; P1C.145@3300.4,5911.58 P1C.159@3429.66,5911.58 ; P1C.155@3300.4,6036.58 P1C.159@3429.66,6036.58 ; P1C.157@3426.26,3731.26 v1(3475,3731.26) P1C.2@3555.52,3731.26 ; P1C.157@3426.26,3856.26 v1(3475,3856.26) P1C.12@3555.52,3856.26 ; P1C.157@3426.26,3981.26 v1(3475,3981.26) P1C.22@3555.52,3981.26 ; P1C.157@3426.26,4106.26 v1(3475,4106.26) P1C.32@3555.52,4106.26 ; P1C.157@3426.26,4231.26 v1(3475,4231.26) P1C.42@3555.52,4231.26 ; P1C.157@3426.26,4356.26 v1(3475,4356.26) P1C.52@3555.52,4356.26 ; P1C.158@3426.26,4696.42 3475,4696.42 P1C.64@3555.52,4696.42 ; P1C.158@3426.26,4946.42 v1(3475,4946.42) P1C.84@3555.52,4946.42 ; P1C.158@3426.26,5071.42 v1(3475,5071.42) P1C.94@3555.52,5071.42 ; P1C.158@3426.26,5121.42 v1(3475,5121.42) P1C.98@3555.52,5121.42 ; P1C.158@3426.26,5196.42 v1(3475,5196.42) P1C.104@3555.52,5196.42 ; P1C.159@3426.26,5411.58 v1(3475,5411.58) P1C.106@3555.52,5411.58 ; P1C.159@3426.26,5536.58 v1(3475,5536.58) P1C.116@3555.52,5536.58 ; P1C.159@3426.26,5661.58 v1(3475,5661.58) P1C.126@3555.52,5661.58 ; P1C.159@3426.26,5786.58 v1(3475,5786.58) P1C.136@3555.52,5786.58 ; P1C.159@3426.26,6036.58 v1(3475,6036.58) P1C.156@3555.52,6036.58 ; P1C.158@3427.96,4571.42 v1@3475,4571.42 ; P1C.158@3427.96,4821.42 3475,4821.42 ; P1C.159@3430.74,5911.5 3475,5911.5 ; v1(3491,5586) 3491.57,5586.58 P1C.120@3555.52,5586.58 ; P1C.54@3555.52,4571.42 v1@3475,4571.42 ; P1C.74@3555.52,4821.42 3475,4821.42 ; P1C.146@3555.52,5911.5 3475,5911.5 ; P7.5@4595,3780 P7.157@4724.26,3780 ; P7.9@4595,3831.26 P7.157@4724.26,3831.26 ; P7.89@4600,5020 P7.158@4729.26,5020 ; P7.1@4600.4,3731.26 P7.157@4729.66,3731.26 ; P7.11@4600.4,3856.26 P7.157@4729.66,3856.26 ; P7.15@4600.4,3906.26 P7.157@4729.66,3906.26 ; P7.19@4600.4,3956.26 P7.157@4729.66,3956.26 ; P7.21@4600.4,3981.26 P7.157@4729.66,3981.26 ; P7.31@4600.4,4106.26 P7.157@4729.66,4106.26 ; P7.41@4600.4,4231.26 P7.157@4729.66,4231.26 ; P7.51@4600.4,4356.26 P7.157@4729.66,4356.26 ; P7.53@4600.4,4571.42 P7.158@4729.66,4571.42 ; P7.63@4600.4,4696.42 P7.158@4729.66,4696.42 ; P7.73@4600.4,4821.42 P7.158@4729.66,4821.42 ; P7.83@4600.4,4946.42 P7.158@4729.66,4946.42 ; P7.93@4600.4,5071.42 P7.158@4729.66,5071.42 ; P7.103@4600.4,5196.42 P7.158@4729.66,5196.42 ; P7.105@4600.4,5411.58 P7.159@4729.66,5411.58 ; P7.115@4600.4,5536.58 P7.159@4729.66,5536.58 ; P7.125@4600.4,5661.58 P7.159@4729.66,5661.58 ; P7.135@4600.4,5786.58 P7.159@4729.66,5786.58 ; P7.145@4600.4,5911.58 P7.159@4729.66,5911.58 ; P7.155@4600.4,6036.58 P7.159@4729.66,6036.58 ; P7.157@4725,4355 P7.157@4726.26,4356.26 ; P7.157@4726.26,3856.26 v1(4775,3856.26) P7.12@4855.52,3856.26 ; P7.157@4726.26,3981.26 v1(4775,3981.26) P7.22@4855.52,3981.26 ; P7.157@4726.26,4106.26 v1(4775,4106.26) P7.32@4855.52,4106.26 ; P7.157@4726.26,4231.26 v1(4775,4231.26) P7.42@4855.52,4231.26 ; P7.158@4726.26,4696.42 v1(4775,4696.42) P7.64@4855.52,4696.42 ; P7.158@4726.26,4821.42 v1(4770,4821.42) P7.74@4855.52,4821.42 ; P7.158@4726.26,4946.42 v1(4775,4946.42) P7.84@4855.52,4946.42 ; P7.158@4726.26,5071.42 v1(4775,5071.42) P7.94@4855.52,5071.42 ; P7.158@4726.26,5121.42 v1(4775,5121.42) P7.98@4855.52,5121.42 ; P7.158@4726.26,5196.42 v1(4775,5196.42) P7.104@4855.52,5196.42 ; P7.159@4726.26,5411.58 v1(4775,5411.58) P7.106@4855.52,5411.58 ; P7.159@4726.26,5536.58 v1(4775,5536.58) P7.116@4855.52,5536.58 ; P7.159@4726.26,5661.58 v1(4775,5661.58) P7.126@4855.52,5661.58 ; P7.159@4726.26,5786.58 v1(4775,5786.58) P7.136@4855.52,5786.58 ; P7.159@4726.26,6036.58 v1(4775,6036.58) P7.156@4855.52,6036.58 ; P7.157@4727.96,3731.26 4775,3731.26 ; P7.157@4727.96,4356.26 v1@4775,4356.26 ; P7.158@4727.96,4571.42 4775,4571.42 ; P7.159@4730.74,5911.5 4775,5911.5 ; v1(4775,5890) 4775,5911.5 ; v1(4784,5586) 4784.57,5586.58 P7.120@4855.52,5586.58 ; P7.2@4855.52,3731.26 4775,3731.26 ; P7.52@4855.52,4356.26 v1@4775,4356.26 ; P7.54@4855.52,4571.42 4775,4571.42 ; P7.146@4860,5911.5 4775,5911.5 ; P2.145@5900,5911.5 P2.159@6024.26,5911.5 ; P2.1@5900.4,3731.26 P2.157@6024.66,3731.26 ; P2.11@5900.4,3856.26 P2.157@6024.66,3856.26 ; P2.21@5900.4,3981.26 P2.157@6024.66,3981.26 ; P2.27@5900.4,4056.26 P2.157@6024.66,4056.26 ; P2.31@5900.4,4106.26 P2.157@6024.66,4106.26 ; P2.37@5900.4,4181.26 P2.157@6024.66,4181.26 ; P2.41@5900.4,4231.26 P2.157@6024.66,4231.26 ; P2.51@5900.4,4356.26 P2.157@6024.66,4356.26 ; P2.53@5900.4,4571.42 v1(5990,4571.42) P2.158@6024.66,4571.42 ; P2.63@5900.4,4696.42 5983.58,4696.42 ; P2.73@5900.4,4821.42 v1(5985,4821.42) P2.158@6024.66,4821.42 ; P2.83@5900.4,4946.42 v1(5975,4946.42) P2.158@6024.66,4946.42 ; P2.93@5900.4,5071.42 5985,5071.42 ; P2.103@5900.4,5196.42 P2.158@6024.66,5196.42 ; P2.105@5900.4,5411.58 P2.159@6024.66,5411.58 ; P2.115@5900.4,5536.58 P2.159@6024.66,5536.58 ; P2.125@5900.4,5661.58 P2.159@6024.66,5661.58 ; P2.135@5900.4,5786.58 P2.159@6024.66,5786.58 ; P2.155@5900.4,6036.58 P2.159@6024.66,6036.58 ; P2.158@6024.66,4696.42 5985,4696.42 ; P2.158@6024.66,5071.42 5985,5071.42 ; P2.157@6025,3725 6031.26,3731.26 6075,3731.26 ; P2.157@6031.26,3856.26 v1(6075,3856.26) P2.12@6155.52,3856.26 ; P2.157@6031.26,3981.26 v1(6075,3981.26) P2.22@6155.52,3981.26 ; P2.157@6031.26,4056.26 v1(6075,4056.26) P2.28@6155.52,4056.26 ; P2.157@6031.26,4106.26 v1(6075,4106.26) P2.32@6155.52,4106.26 ; P2.157@6031.26,4181.26 v1(6075,4181.26) P2.38@6155.52,4181.26 ; P2.157@6031.26,4231.26 v1(6075,4231.26) P2.42@6155.52,4231.26 ; P2.157@6031.26,4281.26 v1(6075,4281.26) P2.46@6155.52,4281.26 ; P2.157@6031.26,4356.26 v1(6075,4356.26) P2.52@6155.52,4356.26 ; P2.158@6031.26,4571.42 P2.54@6155.52,4571.42 ; P2.158@6031.26,4696.42 P2.64@6155.52,4696.42 ; P2.158@6031.26,4821.42 P2.74@6155.52,4821.42 ; P2.158@6031.26,4946.42 P2.84@6155.52,4946.42 ; P2.158@6031.26,5071.42 P2.94@6155.52,5071.42 ; P2.158@6031.26,5196.42 v1(6080,5196.42) P2.104@6155.52,5196.42 ; P2.159@6031.26,5411.58 v1(6065,5411.58) P2.106@6155.52,5411.58 ; P2.159@6031.26,5461.58 v1(6065,5461.58) P2.110@6155.52,5461.58 ; P2.159@6031.26,5536.58 v1(6060,5536.58) P2.116@6155.52,5536.58 ; P2.159@6031.26,5661.58 v1(6075,5661.58) P2.126@6155.52,5661.58 ; P2.159@6031.26,5786.58 v1(6070,5786.58) P2.136@6155.52,5786.58 ; P2.159@6031.26,6036.58 v1(6070,6036.58) P2.156@6155.52,6036.58 ; P2.159@6035.74,5911.5 6075,5911.5 ; P2.2@6155.52,3731.26 6075,3731.26 ; P2.146@6155.52,5911.5 6075,5911.5 ; P3A.32@7200,5660 P3A.157@7332.29,5660 ; P3A.156@7200.4,3731.46 7263,3731.46 ; P3A.154@7200.4,3756.46 7254.54,3756.46 7263,3748 7263,3731.46 ; P3A.150@7200.4,3806.46 P3A.159@7332.69,3806.46 ; P3A.146@7200.4,3856.46 P3A.159@7332.69,3856.46 ; P3A.144@7200.4,3881.46 P3A.159@7332.69,3881.46 ; P3A.140@7200.4,3931.46 P3A.159@7332.69,3931.46 ; P3A.136@7200.4,3981.46 P3A.159@7332.69,3981.46 ; P3A.134@7200.4,4006.46 P3A.159@7332.69,4006.46 ; P3A.130@7200.4,4056.46 P3A.159@7332.69,4056.46 ; P3A.126@7200.4,4106.46 P3A.159@7332.69,4106.46 ; P3A.124@7200.4,4131.46 P3A.159@7332.69,4131.46 ; P3A.120@7200.4,4181.46 P3A.159@7332.69,4181.46 ; P3A.116@7200.4,4231.46 P3A.159@7332.69,4231.46 ; P3A.114@7200.4,4256.46 P3A.159@7332.69,4256.46 ; P3A.110@7200.4,4306.46 P3A.159@7332.69,4306.46 ; P3A.106@7200.4,4356.46 P3A.159@7332.69,4356.46 ; P3A.104@7200.4,4571.61 P3A.158@7332.69,4571.61 ; P3A.94@7200.4,4696.61 v1@7385,4696.61 ; P3A.84@7200.4,4821.61 P3A.158@7332.69,4821.61 ; P3A.74@7200.4,4946.61 P3A.158@7332.69,4946.61 ; P3A.64@7200.4,5071.61 P3A.158@7332.69,5071.61 ; P3A.54@7200.4,5196.61 P3A.158@7332.69,5196.61 ; P3A.52@7200.4,5411.77 P3A.157@7332.69,5411.77 ; P3A.46@7200.4,5486.77 P3A.157@7332.69,5486.77 ; P3A.42@7200.4,5536.77 P3A.157@7332.69,5536.77 ; P3A.22@7200.4,5786.77 P3A.157@7332.69,5786.77 ; P3A.12@7200.4,5911.77 P3A.157@7332.69,5911.77 ; P3A.2@7200.4,6036.77 P3A.157@7332.69,6036.77 ; P3A.157@7320,6040 7323.23,6036.77 v1@7385,6036.77 ; P3A.159@7323.23,3731.46 v1(7385,3731.46) P3A.155@7455.52,3731.46 ; P3A.159@7323.23,3781.46 P3A.151@7455.52,3781.46 ; P3A.159@7323.23,3831.46 P3A.147@7455.52,3831.46 ; P3A.159@7323.23,3856.46 v1(7385,3856.46) P3A.145@7455.52,3856.46 ; P3A.159@7323.23,3906.46 P3A.141@7455.52,3906.46 ; P3A.159@7323.23,3956.46 v1(7385,3956.46) P3A.137@7455.52,3956.46 ; P3A.159@7323.23,3981.46 P3A.135@7455.52,3981.46 ; P3A.159@7323.23,4031.46 P3A.131@7455.52,4031.46 ; P3A.159@7323.23,4081.46 v1(7385,4081.46) P3A.127@7455.52,4081.46 ; P3A.159@7323.23,4106.46 P3A.125@7455.52,4106.46 ; P3A.159@7323.23,4156.46 v1(7385,4156.46) P3A.121@7455.52,4156.46 ; P3A.159@7323.23,4206.46 P3A.117@7455.52,4206.46 ; P3A.159@7323.23,4231.46 P3A.115@7455.52,4231.46 ; P3A.159@7323.23,4281.46 v1(7385,4281.46) P3A.111@7455.52,4281.46 ; P3A.159@7323.23,4356.46 v1(7380,4356.46) ; P3A.158@7323.23,4571.61 v1@7385,4571.61 ; P3A.158@7323.23,4821.61 v1(7385,4821.61) P3A.83@7455.52,4821.61 ; P3A.158@7323.23,4946.61 v1(7385,4946.61) P3A.73@7455.52,4946.61 ; P3A.158@7323.23,5071.61 v1(7385,5071.61) P3A.63@7455.52,5071.61 ; P3A.158@7323.23,5196.61 v1@7385,5196.61 ; P3A.157@7323.23,5411.77 v1(7385,5411.77) P3A.51@7455.52,5411.77 ; P3A.157@7323.23,5536.77 v1@7385,5536.77 ; P3A.157@7323.23,5786.77 v1(7385,5786.77) P3A.21@7455.52,5786.77 ; P3A.157@7323.23,5911.77 v1(7385,5911.77) P3A.11@7455.52,5911.77 ; P3A.157@7327.71,5660 v1@7385,5660 ; P3A.159@7332.69,3731.46 7263,3731.46 ; v1(7380,4571.61) v1@7385,4571.61 ; v1(7380,4696.61) v1@7385,4696.61 ; v1(7380,5196.61) v1@7385,5196.61 ; v1(7380,5536.77) v1@7385,5536.77 ; v1(7380,5660) v1@7385,5660 ; v1(7380,6036.77) v1@7385,6036.77 ; P3A.107@7455.52,4331.46 7405,4331.46 v1(7380,4356.46) ; P3A.105@7455.52,4356.46 7385,4356.46 v1(7380,4356.46) ; P3A.103@7455.52,4571.61 v1@7385,4571.61 ; P3A.93@7455.52,4696.61 v1@7385,4696.61 ; P3A.53@7455.52,5196.61 v1@7385,5196.61 ; P3A.41@7455.52,5536.77 v1@7385,5536.77 ; P3A.1@7455.52,6036.77 v1@7385,6036.77 ; P3A.31@7460,5660 v1@7385,5660 ; P3B.32@8500,5660 P3B.157@8632.29,5660 ; P3B.156@8500.4,3731.46 8562,3731.46 ; P3B.154@8500.4,3756.46 8552.54,3756.46 8561,3748 8561,3732.46 8562,3731.46 ; P3B.150@8500.4,3806.46 P3B.159@8632.69,3806.46 ; P3B.146@8500.4,3856.46 P3B.159@8632.69,3856.46 ; P3B.144@8500.4,3881.46 P3B.159@8632.69,3881.46 ; P3B.140@8500.4,3931.46 P3B.159@8632.69,3931.46 ; P3B.136@8500.4,3981.46 P3B.159@8632.69,3981.46 ; P3B.134@8500.4,4006.46 P3B.159@8632.69,4006.46 ; P3B.130@8500.4,4056.46 P3B.159@8632.69,4056.46 ; P3B.126@8500.4,4106.46 P3B.159@8632.69,4106.46 ; P3B.124@8500.4,4131.46 P3B.159@8632.69,4131.46 ; P3B.120@8500.4,4181.46 P3B.159@8632.69,4181.46 ; P3B.116@8500.4,4231.46 P3B.159@8632.69,4231.46 ; P3B.114@8500.4,4256.46 P3B.159@8632.69,4256.46 ; P3B.110@8500.4,4306.46 P3B.159@8632.69,4306.46 ; P3B.106@8500.4,4356.46 P3B.159@8632.69,4356.46 ; P3B.104@8500.4,4571.61 P3B.158@8632.69,4571.61 ; P3B.84@8500.4,4821.61 P3B.158@8632.69,4821.61 ; P3B.74@8500.4,4946.61 P3B.158@8632.69,4946.61 ; P3B.64@8500.4,5071.61 P3B.158@8632.69,5071.61 ; P3B.54@8500.4,5196.61 P3B.158@8632.69,5196.61 ; P3B.52@8500.4,5411.77 P3B.157@8632.69,5411.77 ; P3B.46@8500.4,5486.77 P3B.157@8632.69,5486.77 ; P3B.42@8500.4,5536.77 P3B.157@8632.69,5536.77 ; P3B.22@8500.4,5786.77 P3B.157@8632.69,5786.77 ; P3B.12@8500.4,5911.77 P3B.157@8632.69,5911.77 ; P3B.2@8500.4,6036.77 P3B.157@8632.69,6036.77 ; P3B.159@8623.23,3731.46 v1(8685,3731.46) P3B.155@8755.52,3731.46 ; P3B.159@8623.23,3781.46 P3B.151@8755.52,3781.46 ; P3B.159@8623.23,3831.46 P3B.147@8755.52,3831.46 ; P3B.159@8623.23,3856.46 v1(8685,3856.46) P3B.145@8755.52,3856.46 ; P3B.159@8623.23,3906.46 P3B.141@8755.52,3906.46 ; P3B.159@8623.23,3956.46 v1(8685,3956.46) P3B.137@8755.52,3956.46 ; P3B.159@8623.23,3981.46 P3B.135@8755.52,3981.46 ; P3B.159@8623.23,4031.46 P3B.131@8755.52,4031.46 ; P3B.159@8623.23,4081.46 v1(8685,4081.46) P3B.127@8755.52,4081.46 ; P3B.159@8623.23,4106.46 P3B.125@8755.52,4106.46 ; P3B.159@8623.23,4156.46 v1(8685,4156.46) P3B.121@8755.52,4156.46 ; P3B.159@8623.23,4206.46 P3B.117@8755.52,4206.46 ; P3B.159@8623.23,4231.46 P3B.115@8755.52,4231.46 ; P3B.159@8623.23,4281.46 v1(8685,4281.46) P3B.111@8755.52,4281.46 ; P3B.159@8623.23,4356.46 v1(8680,4356.46) ; P3B.158@8623.23,4571.61 v1@8685,4571.61 ; P3B.158@8623.23,4821.61 v1(8685,4821.61) P3B.83@8755.52,4821.61 ; P3B.158@8623.23,4946.61 v1(8685,4946.61) P3B.73@8755.52,4946.61 ; P3B.158@8623.23,5071.61 v1(8685,5071.61) P3B.63@8755.52,5071.61 ; P3B.158@8623.23,5196.61 v1@8685,5196.61 ; P3B.157@8623.23,5411.77 v1(8685,5411.77) P3B.51@8755.52,5411.77 ; P3B.157@8623.23,5536.77 v1@8685,5536.77 ; P3B.157@8623.23,5786.77 v1(8685,5786.77) P3B.21@8755.52,5786.77 ; P3B.157@8623.23,5911.77 v1(8685,5911.77) P3B.11@8755.52,5911.77 ; P3B.157@8623.23,6036.77 v1@8685,6036.77 ; P3B.157@8627.71,5660 v1@8685,5660 ; P3B.159@8632.69,3731.46 8562,3731.46 ; v1(8680,4571.61) v1@8685,4571.61 ; v1(8680,4696.61) v1@8685,4696.61 ; v1(8680,5196.61) v1@8685,5196.61 ; v1(8680,5536.77) v1@8685,5536.77 ; v1(8680,5660) v1@8685,5660 ; v1(8680,6036.77) v1@8685,6036.77 ; P3B.107@8755.52,4331.46 8754.98,4332 8704.46,4332 v1(8680,4356.46) ; P3B.105@8755.52,4356.46 8685,4356.46 v1(8680,4356.46) ; P3B.103@8755.52,4571.61 v1@8685,4571.61 ; P3B.93@8755.52,4696.61 v1@8685,4696.61 ; P3B.53@8755.52,5196.61 v1@8685,5196.61 ; P3B.41@8755.52,5536.77 v1@8685,5536.77 ; P3B.1@8755.52,6036.77 v1@8685,6036.77 ; P3B.31@8760,5660 v1@8685,5660 ; P3C.32@9800,5660 P3C.157@9932.29,5660 ; P3C.156@9800.4,3731.46 9868,3731.46 ; P3C.154@9800.4,3756.46 9856.54,3756.46 9868,3745 9868,3731.46 ; P3C.150@9800.4,3806.46 P3C.159@9932.69,3806.46 ; P3C.146@9800.4,3856.46 P3C.159@9932.69,3856.46 ; P3C.144@9800.4,3881.46 P3C.159@9932.69,3881.46 ; P3C.140@9800.4,3931.46 P3C.159@9932.69,3931.46 ; P3C.136@9800.4,3981.46 P3C.159@9932.69,3981.46 ; P3C.134@9800.4,4006.46 P3C.159@9932.69,4006.46 ; P3C.130@9800.4,4056.46 P3C.159@9932.69,4056.46 ; P3C.126@9800.4,4106.46 P3C.159@9932.69,4106.46 ; P3C.124@9800.4,4131.46 P3C.159@9932.69,4131.46 ; P3C.120@9800.4,4181.46 P3C.159@9932.69,4181.46 ; P3C.116@9800.4,4231.46 P3C.159@9932.69,4231.46 ; P3C.114@9800.4,4256.46 P3C.159@9932.69,4256.46 ; P3C.110@9800.4,4306.46 P3C.159@9932.69,4306.46 ; P3C.106@9800.4,4356.46 P3C.159@9932.69,4356.46 ; P3C.104@9800.4,4571.61 P3C.158@9932.69,4571.61 ; P3C.84@9800.4,4821.61 P3C.158@9932.69,4821.61 ; P3C.74@9800.4,4946.61 P3C.158@9932.69,4946.61 ; P3C.64@9800.4,5071.61 P3C.158@9932.69,5071.61 ; P3C.54@9800.4,5196.61 P3C.158@9932.69,5196.61 ; P3C.52@9800.4,5411.77 P3C.157@9932.69,5411.77 ; P3C.46@9800.4,5486.77 P3C.157@9932.69,5486.77 ; P3C.42@9800.4,5536.77 P3C.157@9932.69,5536.77 ; P3C.22@9800.4,5786.77 P3C.157@9932.69,5786.77 ; P3C.12@9800.4,5911.77 P3C.157@9932.69,5911.77 ; P3C.2@9800.4,6036.77 P3C.157@9932.69,6036.77 ; P3C.159@9923.23,3731.46 v1(9985,3731.46) P3C.155@10055.52,3731.46 ; P3C.159@9923.23,3781.46 P3C.151@10055.52,3781.46 ; P3C.159@9923.23,3831.46 P3C.147@10055.52,3831.46 ; P3C.159@9923.23,3856.46 v1(9985,3856.46) P3C.145@10055.52,3856.46 ; P3C.159@9923.23,3906.46 P3C.141@10055.52,3906.46 ; P3C.159@9923.23,3956.46 v1(9985,3956.46) P3C.137@10055.52,3956.46 ; P3C.159@9923.23,3981.46 P3C.135@10055.52,3981.46 ; P3C.159@9923.23,4031.46 P3C.131@10055.52,4031.46 ; P3C.159@9923.23,4081.46 v1(9985,4081.46) P3C.127@10055.52,4081.46 ; P3C.159@9923.23,4106.46 P3C.125@10055.52,4106.46 ; P3C.159@9923.23,4156.46 v1(9985,4156.46) P3C.121@10055.52,4156.46 ; P3C.159@9923.23,4206.46 P3C.117@10055.52,4206.46 ; P3C.159@9923.23,4231.46 P3C.115@10055.52,4231.46 ; P3C.159@9923.23,4281.46 v1(9985,4281.46) P3C.111@10055.52,4281.46 ; P3C.159@9923.23,4356.46 v1(9980,4356.46) ; P3C.158@9923.23,4571.61 v1@9985,4571.61 ; P3C.158@9923.23,4821.61 v1(9985,4821.61) P3C.83@10055.52,4821.61 ; P3C.158@9923.23,4946.61 v1(9985,4946.61) P3C.73@10055.52,4946.61 ; P3C.158@9923.23,5071.61 v1(9985,5071.61) P3C.63@10055.52,5071.61 ; P3C.158@9923.23,5196.61 v1@9985,5196.61 ; P3C.157@9923.23,5411.77 v1(9985,5411.77) P3C.51@10055.52,5411.77 ; P3C.157@9923.23,5536.77 v1@9985,5536.77 ; P3C.157@9923.23,5786.77 v1(9985,5786.77) P3C.21@10055.52,5786.77 ; P3C.157@9923.23,5911.77 v1(9985,5911.77) P3C.11@10055.52,5911.77 ; P3C.157@9923.23,6036.77 v1@9985,6036.77 ; P3C.157@9927.71,5660 v1@9985,5660 ; P3C.159@9932.69,3731.46 9868,3731.46 ; v1(9980,4571.61) v1@9985,4571.61 ; v1(9980,4696.61) v1@9985,4696.61 ; v1(9980,5196.61) v1@9985,5196.61 ; v1(9980,5536.77) v1@9985,5536.77 ; v1(9980,5660) v1@9985,5660 ; v1(9980,6036.77) v1@9985,6036.77 ; P3C.107@10055.52,4331.46 10005,4331.46 v1(9980,4356.46) ; P3C.105@10055.52,4356.46 9985,4356.46 v1(9980,4356.46) ; P3C.103@10055.52,4571.61 v1@9985,4571.61 ; P3C.93@10055.52,4696.61 v1@9985,4696.61 ; P3C.53@10055.52,5196.61 v1@9985,5196.61 ; P3C.41@10055.52,5536.77 v1@9985,5536.77 ; P3C.1@10055.52,6036.77 v1@9985,6036.77 ; P3C.31@10060,5660 v1@9985,5660 ; P6.32@11100,5660 P6.157@11232.29,5660 ; P6.156@11100.4,3731.46 11168,3731.46 ; P6.154@11100.4,3756.46 11163.54,3756.46 11169,3751 11169,3732.46 11168,3731.46 ; P6.150@11100.4,3806.46 P6.159@11232.69,3806.46 ; P6.146@11100.4,3856.46 P6.159@11232.69,3856.46 ; P6.144@11100.4,3881.46 P6.159@11232.69,3881.46 ; P6.140@11100.4,3931.46 P6.159@11232.69,3931.46 ; P6.136@11100.4,3981.46 P6.159@11232.69,3981.46 ; P6.134@11100.4,4006.46 P6.159@11232.69,4006.46 ; P6.130@11100.4,4056.46 P6.159@11232.69,4056.46 ; P6.126@11100.4,4106.46 P6.159@11232.69,4106.46 ; P6.124@11100.4,4131.46 P6.159@11232.69,4131.46 ; P6.120@11100.4,4181.46 P6.159@11232.69,4181.46 ; P6.116@11100.4,4231.46 P6.159@11232.69,4231.46 ; P6.114@11100.4,4256.46 P6.159@11232.69,4256.46 ; P6.110@11100.4,4306.46 P6.159@11232.69,4306.46 ; P6.106@11100.4,4356.46 P6.159@11232.69,4356.46 ; P6.104@11100.4,4571.61 P6.158@11232.69,4571.61 ; P6.84@11100.4,4821.61 P6.158@11232.69,4821.61 ; P6.74@11100.4,4946.61 P6.158@11232.69,4946.61 ; P6.64@11100.4,5071.61 P6.158@11232.69,5071.61 ; P6.54@11100.4,5196.61 P6.158@11232.69,5196.61 ; P6.52@11100.4,5411.77 P6.157@11232.69,5411.77 ; P6.46@11100.4,5486.77 P6.157@11232.69,5486.77 ; P6.42@11100.4,5536.77 P6.157@11232.69,5536.77 ; P6.22@11100.4,5786.77 P6.157@11232.69,5786.77 ; P6.12@11100.4,5911.77 P6.157@11232.69,5911.77 ; P6.2@11100.4,6036.77 P6.157@11232.69,6036.77 ; P6.159@11223.23,3731.46 v1(11285,3731.46) P6.155@11355.52,3731.46 ; P6.159@11223.23,3781.46 P6.151@11355.52,3781.46 ; P6.159@11223.23,3831.46 P6.147@11355.52,3831.46 ; P6.159@11223.23,3856.46 v1(11285,3856.46) P6.145@11355.52,3856.46 ; P6.159@11223.23,3906.46 P6.141@11355.52,3906.46 ; P6.159@11223.23,3956.46 v1(11285,3956.46) P6.137@11355.52,3956.46 ; P6.159@11223.23,3981.46 P6.135@11355.52,3981.46 ; P6.159@11223.23,4031.46 P6.131@11355.52,4031.46 ; P6.159@11223.23,4081.46 v1(11285,4081.46) P6.127@11355.52,4081.46 ; P6.159@11223.23,4106.46 P6.125@11355.52,4106.46 ; P6.159@11223.23,4156.46 v1(11285,4156.46) P6.121@11355.52,4156.46 ; P6.159@11223.23,4206.46 P6.117@11355.52,4206.46 ; P6.159@11223.23,4231.46 P6.115@11355.52,4231.46 ; P6.159@11223.23,4281.46 v1(11285,4281.46) P6.111@11355.52,4281.46 ; P6.159@11223.23,4356.46 v1(11280,4356.46) ; P6.158@11223.23,4571.61 v1@11285,4571.61 ; P6.158@11223.23,4821.61 v1(11285,4821.61) P6.83@11355.52,4821.61 ; P6.158@11223.23,4946.61 v1(11285,4946.61) P6.73@11355.52,4946.61 ; P6.158@11223.23,5071.61 v1(11285,5071.61) P6.63@11355.52,5071.61 ; P6.158@11223.23,5196.61 v1@11285,5196.61 ; P6.157@11223.23,5411.77 v1(11285,5411.77) P6.51@11355.52,5411.77 ; P6.157@11223.23,5536.77 v1@11285,5536.77 ; P6.157@11223.23,5786.77 v1(11285,5786.77) P6.21@11355.52,5786.77 ; P6.157@11223.23,5911.77 v1(11285,5911.77) P6.11@11355.52,5911.77 ; P6.157@11223.23,6036.77 v1@11285,6036.77 ; P6.157@11227.71,5660 v1@11285,5660 ; P6.159@11227.96,3731.46 11168,3731.46 ; v1(11280,4571.61) v1@11285,4571.61 ; v1(11280,4696.61) v1@11285,4696.61 ; v1(11280,5196.61) v1@11285,5196.61 ; v1(11280,5536.77) v1@11285,5536.77 ; v1(11280,5660) v1@11285,5660 ; v1(11280,6036.77) v1@11285,6036.77 ; P6.107@11355.52,4331.46 11305,4331.46 v1(11280,4356.46) ; P6.105@11355.52,4356.46 11285,4356.46 v1(11280,4356.46) ; P6.103@11355.52,4571.61 v1@11285,4571.61 ; P6.93@11355.52,4696.61 v1@11285,4696.61 ; P6.53@11355.52,5196.61 v1@11285,5196.61 ; P6.41@11355.52,5536.77 v1@11285,5536.77 ; P6.1@11355.52,6036.77 v1@11285,6036.77 ; P6.31@11360,5660 v1@11285,5660 ; P4.125@12700,5659.5 P4.159@12832.29,5659.5 ; P4.1@12700.4,3730.96 P4.157@12832.69,3730.96 ; P4.11@12700.4,3855.96 P4.157@12832.69,3855.96 ; P4.21@12700.4,3980.96 P4.157@12832.69,3980.96 ; P4.31@12700.4,4105.96 P4.157@12832.69,4105.96 ; P4.41@12700.4,4230.96 P4.157@12832.69,4230.96 ; P4.51@12700.4,4355.96 P4.157@12832.69,4355.96 ; P4.53@12700.4,4571.11 P4.158@12832.69,4571.11 ; P4.63@12700.4,4696.11 v1@12885,4696.11 ; P4.63@12700.4,4696.61 v1(12880,4696.61) ; P4.73@12700.4,4821.11 P4.158@12832.69,4821.11 ; P4.83@12700.4,4946.11 P4.158@12832.69,4946.11 ; P4.93@12700.4,5071.11 P4.158@12832.69,5071.11 ; P4.103@12700.4,5196.11 P4.158@12832.69,5196.11 ; P4.105@12700.4,5411.27 P4.159@12832.69,5411.27 ; P4.115@12700.4,5536.27 P4.159@12832.69,5536.27 ; P4.135@12700.4,5786.27 P4.159@12832.69,5786.27 ; P4.145@12700.4,5911.27 P4.159@12832.69,5911.27 ; P4.155@12700.4,6036.27 P4.159@12832.69,6036.27 ; P4.157@12823.23,3731.46 v1(12885,3731.46) P4.2@12955.52,3731.46 ; P4.157@12823.23,3856.46 v1(12885,3856.46) P4.12@12955.52,3856.46 ; P4.157@12823.23,3956.46 v1(12885,3956.46) ; P4.157@12823.23,3981.46 P4.22@12955.52,3981.46 ; P4.157@12823.23,4081.46 v1(12885,4081.46) ; P4.157@12823.23,4106.46 P4.32@12955.52,4106.46 ; P4.157@12823.23,4156.46 v1(12885,4156.46) ; P4.157@12823.23,4231.46 P4.42@12955.52,4231.46 ; P4.157@12823.23,4281.46 v1(12885,4281.46) P4.46@12955.52,4281.46 ; P4.157@12823.23,4356.46 v1@12885,4356.46 ; P4.158@12823.23,4571.61 v1(12880,4571.61) ; P4.158@12823.23,4821.61 v1(12885,4821.61) 12885.2,4821.42 P4.74@12955.52,4821.42 ; P4.158@12823.23,4946.61 v1(12885,4946.61) 12885.2,4946.42 P4.84@12955.52,4946.42 ; P4.158@12823.23,5071.61 v1(12885,5071.61) 12955.32,5071.61 P4.94@12955.52,5071.42 ; P4.158@12823.23,5196.61 v1(12880,5196.61) ; P4.159@12823.23,5411.77 v1(12885,5411.77) P4.106@12955.52,5411.77 ; P4.159@12823.23,5536.77 v1@12885,5536.77 ; P4.159@12823.23,5786.77 v1(12885,5786.77) P4.136@12955.52,5786.77 ; P4.159@12823.23,5911.77 v1(12885,5911.77) P4.146@12955.52,5911.77 ; P4.159@12823.23,6036.77 v1@12885,6036.77 ; P4.159@12827.71,5660 v1@12885,5660 ; v1(12880,4356.46) v1@12885,4356.46 ; v1(12880,5536.77) v1@12885,5536.77 ; v1(12880,5660) v1@12885,5660 ; v1(12880,6036.77) v1@12885,6036.77 ; v1@12885,4571.61 v1(12880,4571.61) ; v1@12885,4696.61 v1(12880,4696.61) ; v1@12885,5196.61 v1(12880,5196.61) ; P4.52@12955.52,4356.46 v1@12885,4356.46 ; P4.54@12955.52,4571.42 12955.32,4571.61 v1(12880,4571.61) ; P4.64@12955.52,4696.42 12880.2,4696.42 v1(12880,4696.61) ; P4.104@12955.52,5196.42 12880.2,5196.42 v1(12880,5196.61) ; P4.116@12955.52,5536.77 v1@12885,5536.77 ; P4.156@12955.52,6036.77 v1@12885,6036.77 ; P4.126@12960,5660 v1@12885,5660 ; 870,5911.5 v1(870,5890) 870,5911.5 ; 2170,4696.42 v1(2170,4660) 2170,4696.42 ; 2175,4821.42 v1(2175,4785) 2175,4821.42 ; 2175,5911.5 v1(2175,5890) 2175,5911.5 ; v1@3475,4571.42 v1(3475,4565) v1@3475,4571.42 ; 3475,4821.42 v1(3475,4785) 3475,4821.42 ; 3475,5911.5 v1(3475,5890) 3475,5911.5 ; 4775,3731.26 v1(4775,3635) 4775,3731.26 ; v1@4775,4356.26 v1(4775,4345) v1@4775,4356.26 ; 4775,4571.42 v1(4775,4470) 4775,4571.42 ; 5983.58,4696.42 v1(5965,4715) 5966.42,4715 5985,4696.42 ; 5983.58,4696.42 5985,4696.42 ; 5985,5071.42 v1@6000,5086.42 ; 5985,5071.42 v1@6000,5086.42 ; v1@6000,5086.42 v1(6000,5090) v1@6000,5086.42 ; 6075,3731.26 v1(6075,3745) 6075,3731.26 ; 6075,5911.5 v1(6075,5890) 6075,5911.5 ; v1@8685,4696.61 P3B.94@8500.4,4696.61 v1@8685,4696.61 ; v1@9985,4696.61 P3C.94@9800.4,4696.61 v1@9985,4696.61 ; v1@11285,4696.61 P6.94@11100.4,4696.61 v1@11285,4696.61
  Top Layer (*.GTL) w25: v1(917,7383) 920,7386 C86.2@920,7465 ; U3.2@1045,7465 U3.2@1050,7460